# Altium PCB painel_meb.PcbDoc
Units mm, origin at the board's own origin, x right, y up, seen from the top; angles counter-clockwise.
Board outline 175.89 x 40 mm, 2 copper layers (Top Layer, Bottom Layer); 112 components, 106 nets, 292 pads, 87 vias.
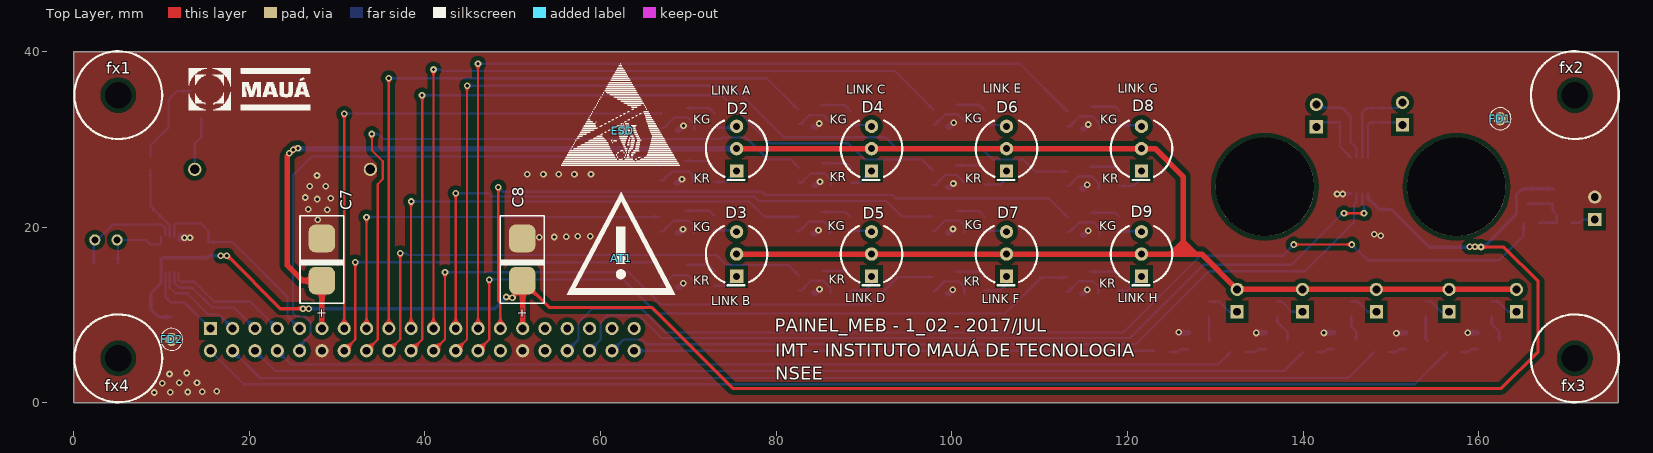
[diagram p0: Top Layer view]
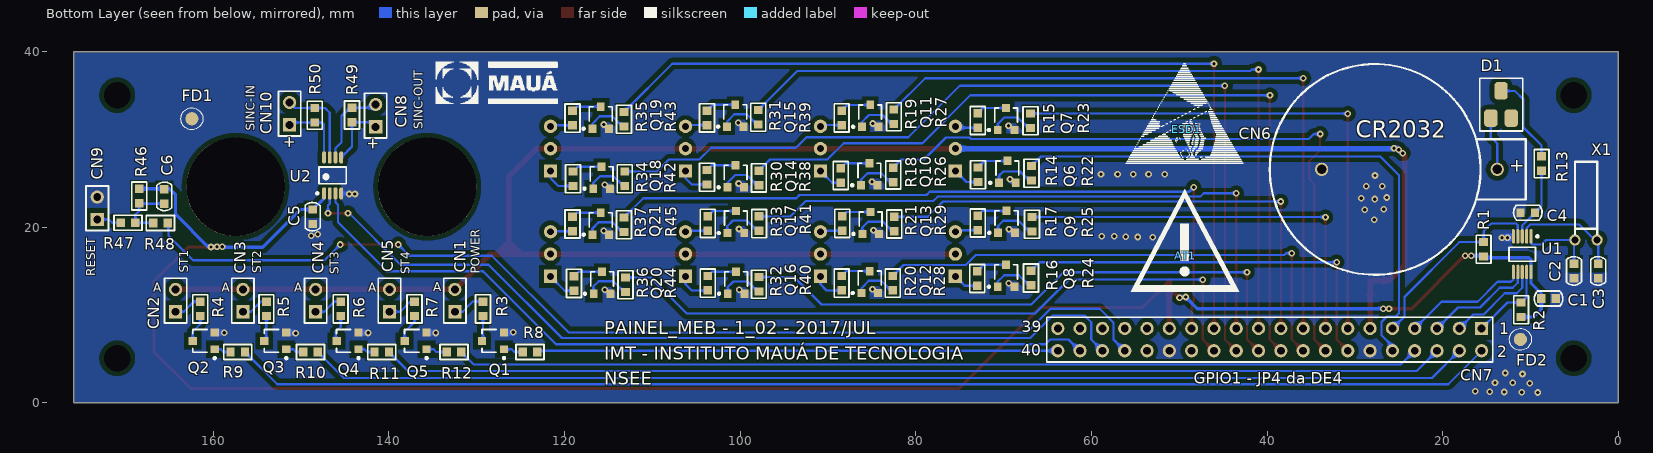
[diagram p1: Bottom Layer view, seen from below]

## Layer stack, top to bottom
Top Solder: solder mask 0.0102, Solder Resist, Dk 3.5
Top Layer: signal copper 0.0356
Dielectric1: core 0.32, FR-4, Dk 4.8
Bottom Layer: signal copper 0.0356
Bottom Solder: solder mask 0.0102, Solder Resist, Dk 3.5

## Board outline
0,0 0,40.005 175.895,40.005 175.895,0

## Design rules (kind name [scope] priority, off if disabled: settings)
Clearance Clearance_3 [(InComponent('U1'))] p1: gap=0.127 except(0.508: Arc-Fill Arc-Poly Track-Fill Track-Poly SMDPad-Fill SMDPad-Poly THPad-Fill THPad-Poly Via-Fill Via-Poly Fill-Fill Fill-Poly Poly-Poly)
Clearance Clearance_4 [(InComponent('U2'))] p2: gap=0.178 except(0.508: Arc-Fill Arc-Poly Track-Fill Track-Poly SMDPad-Fill SMDPad-Poly THPad-Fill THPad-Poly Via-Fill Via-Poly Fill-Fill Fill-Poly Poly-Poly)
Clearance Clearance_2 [InNamedPolygon('gnd_bottom')] p3: gap=0.508
Clearance Clearance_1 [InNamedPolygon('gnd_top')] p4: gap=0.508
Clearance [All] p5: gap=0.254 except(0.178: Track-Track Track-SMDPad)
HoleSize [All] p1: absolutevalues=TRUE maxlimit=150 minlimit=0.025 maxpercent=80.000 minpercent=20.000
PlaneClearance [All] p1: clearance=0.635
PolygonConnect PolygonConnect_2 [All vs IsNamedPolygon('gnd_bottom')] p1: connectstyle=Direct reliefconductorwidth=0.254 reliefentries=4 polygonreliefangle="90 Angle" airgapwidth=0.254
PolygonConnect PolygonConnect_1 [All vs IsNamedPolygon('gnd_top')] p2: connectstyle=Direct reliefconductorwidth=0.254 reliefentries=4 polygonreliefangle="90 Angle" airgapwidth=0.254
PolygonConnect [All] p3: connectstyle=Relief reliefconductorwidth=0.254 reliefentries=4 polygonreliefangle="45 Angle" airgapwidth=0.254
RoutingVias [All] p1: holewidth=0.381 width=0.762 viastyle="Through Hole" minholewidth=0.381 minwidth=0.762 maxholewidth=0.381 maxwidth=0.762
SilkToSolderMaskClearance SilkscreenOverComponentPads [IsPad] p1: minsilkscreentomaskgap=0.076 clearancetoexposedcopper=TRUE
SolderMaskExpansion [All] p1: expansion=0.102
Width Width_alim [(InNetClass('Alimentacoes'))] p1: maxlimit=1.016 minlimit=0.254 preferedwidth=0.635
Width [All] p2: maxlimit=0.635 minlimit=0.254 preferedwidth=0.381
27 further rules are at their usual default settings.

## Classes and differential pairs
net class Alimentacoes: +3V3 +5V GND

## Components (designator, comment, footprint, x,y, rotation, side; value= is the part's Value field where it differs from the comment)
AT1 "##nl" LEIA_DOCUMENTACAO 62.357,16.459 r0 top
AT1 "##nl" LEIA_DOCUMENTACAO 49.327,16.789 r180 bottom
C1 "Capacitor Cerâmico SMD" "0603 - CAP - montagem na maquina" 7.95,11.887 r180 bottom
C2 "Capacitor Cerâmico SMD" "0603 - CAP - montagem na maquina" 5.055,15.037 r270 bottom
C3 "Capacitor Cerâmico SMD" "0603 - CAP - montagem na maquina" 2.286,15.037 r270 bottom
C4 "Capacitor Cerâmico SMD" "0603 - CAP - montagem na maquina" 10.312,21.666 r0 bottom
C5 "Capacitor Cerâmico SMD" "0603 - CAP - montagem na maquina" 148.666,21.209 r270 bottom
C6 "Capacitor Cerâmico SMD" "0603 - CAP - montagem na maquina" 165.583,23.52 r90 bottom
C7 "Capacitor de tântalo" CASE-B 28.27,16.332 r90 top
C8 "Capacitor de tântalo" CASE-B 51.079,16.332 r90 top
CN1 "Header 2" HDR1X2 132.486,10.389 r90 bottom
CN2 "Header 2" HDR1X2 164.287,10.389 r90 bottom
CN3 "Header 2" HDR1X2 156.616,10.389 r90 bottom
CN4 "Header 2" HDR1X2 148.336,10.389 r90 bottom
CN5 "Header 2" HDR1X2 139.929,10.389 r90 bottom
CN6 "11.0137" "Soquete para bateria SB19" 13.792,26.594 r90 bottom
CN7 "Header 20X2" HDR2X20 15.57,8.484 r0 bottom
CN8 "Header 2" HDR1X2 141.503,31.445 r90 bottom
CN9 "Header 2" HDR1X2 173.203,20.904 r90 bottom
CN10 "Header 2" HDR1X2 151.308,31.674 r90 bottom
D1 "04.0100" "SOT23-3N - BAT54FAIRCHILD" 13.36,33.985 r90 bottom
D2 "SSL-LX3059IGW-CA" "Led 3mm bicolor" 75.489,28.956 r0 top
D3 "SSL-LX3059IGW-CA" "Led 3mm bicolor" 75.489,16.956 r0 top
D4 "SSL-LX3059IGW-CA" "Led 3mm bicolor" 90.856,28.956 r0 top
D5 "SSL-LX3059IGW-CA" "Led 3mm bicolor" 90.856,16.956 r0 top
D6 "SSL-LX3059IGW-CA" "Led 3mm bicolor" 106.223,28.956 r0 top
D7 "SSL-LX3059IGW-CA" "Led 3mm bicolor" 106.223,16.956 r0 top
D8 "SSL-LX3059IGW-CA" "Led 3mm bicolor" 121.59,28.956 r0 top
D9 "SSL-LX3059IGW-CA" "Led 3mm bicolor" 121.59,16.956 r0 top
ESD "##nl" ESTATICA 62.509,31.013 r0 top
ESD1 "##nl" ESTATICA 49.149,31.166 r180 bottom
Fab_orientation "Comment" "TEXTO FABRICACAO" 53.162,117.653 r0 top
FD1 "##nl" FIDUCIAL 162.433,32.36 r180 top
FD2 "##nl" FIDUCIAL 11.151,7.239 r180 top
fx1 "Comment" fixa_m3 5.08,35.052 r0 top
fx2 "Comment" fixa_m3 170.942,35.052 r0 top
fx3 "Comment" fixa_m3 170.942,5.08 r0 top
fx4 "Comment" fixa_m3 5.08,5.08 r0 top
Q1 "QNPN" SOT-23B 128.143,7.061 r90 bottom
Q2 "QNPN" SOT-23B 161.087,7.061 r90 bottom
Q3 "QNPN" SOT-23B 152.933,7.061 r90 bottom
Q4 "QNPN" SOT-23B 144.704,7.061 r90 bottom
Q5 "QNPN" SOT-23B 136.957,7.061 r90 bottom
Q6 "QNPN" SOT-23B 69.571,26.314 r180 bottom
Q7 "QNPN" SOT-23B 69.723,32.334 r180 bottom
Q8 "QNPN" SOT-23B 69.723,14.478 r180 bottom
Q9 "QNPN" SOT-23B 69.672,20.625 r180 bottom
Q10 "QNPN" SOT-23B 85.293,26.035 r180 bottom
Q11 "QNPN" SOT-23B 85.192,32.69 r180 bottom
Q12 "QNPN" SOT-23B 85.242,13.767 r180 bottom
Q13 "QNPN" SOT-23B 85.141,20.498 r180 bottom
Q14 "QNPN" SOT-23B 100.508,25.806 r180 bottom
Q15 "QNPN" SOT-23B 100.559,32.715 r180 bottom
Q16 "QNPN" SOT-23B 100.457,13.691 r180 bottom
Q17 "QNPN" SOT-23B 100.482,20.599 r180 bottom
Q18 "QNPN" SOT-23B 115.773,25.654 r180 bottom
Q19 "QNPN" SOT-23B 115.875,32.487 r180 bottom
Q20 "QNPN" SOT-23B 115.722,13.691 r180 bottom
Q21 "QNPN" SOT-23B 115.875,20.422 r180 bottom
R1 "Res3" "0603 - MONTAGEM MÁQUINA" 15.342,17.501 r270 bottom
R2 "Res3" "0603 - MONTAGEM MÁQUINA" 11.074,10.617 r270 bottom
R3 "Res3" "0603 - MONTAGEM MÁQUINA" 129.286,10.719 r90 bottom
R4 "Res3" "0603 - MONTAGEM MÁQUINA" 161.468,10.719 r90 bottom
R5 "Res3" "0603 - MONTAGEM MÁQUINA" 153.949,10.719 r90 bottom
R6 "Res3" "0603 - MONTAGEM MÁQUINA" 145.491,10.719 r90 bottom
R7 "Res3" "0603 - MONTAGEM MÁQUINA" 137.084,10.719 r90 bottom
R8 "Res3" "0603 - MONTAGEM MÁQUINA" 123.927,5.811 r180 bottom
R9 "Res3" "0603 - MONTAGEM MÁQUINA" 157.201,5.811 r180 bottom
R10 "Res3" "0603 - MONTAGEM MÁQUINA" 148.92,5.811 r180 bottom
R11 "Res3" "0603 - MONTAGEM MÁQUINA" 140.818,5.811 r180 bottom
R12 "Res3" "0603 - MONTAGEM MÁQUINA" 132.588,5.811 r180 bottom
R13 "Res3" "0603 - MONTAGEM MÁQUINA" 8.738,27.254 r270 bottom
R14 "Res3" "0603 - MONTAGEM MÁQUINA" 72.923,25.984 r270 bottom
R15 "Res3" "0603 - MONTAGEM MÁQUINA" 72.949,32.156 r270 bottom
R16 "Res3" "0603 - MONTAGEM MÁQUINA" 73,14.173 r270 bottom
R17 "Res3" "0603 - MONTAGEM MÁQUINA" 72.949,20.498 r270 bottom
R18 "Res3" "0603 - MONTAGEM MÁQUINA" 88.544,25.908 r270 bottom
R19 "Res3" "0603 - MONTAGEM MÁQUINA" 88.443,32.461 r270 bottom
R20 "Res3" "0603 - MONTAGEM MÁQUINA" 88.443,13.64 r270 bottom
R21 "Res3" "0603 - MONTAGEM MÁQUINA" 88.367,20.447 r270 bottom
R22 "Res3" "0603 - MONTAGEM MÁQUINA" 66.827,26.162 r90 bottom
R23 "Res3" "0603 - MONTAGEM MÁQUINA" 66.929,32.131 r90 bottom
R24 "Res3" "0603 - MONTAGEM MÁQUINA" 66.878,14.224 r90 bottom
R25 "Res3" "0603 - MONTAGEM MÁQUINA" 66.777,20.345 r90 bottom
R26 "Res3" "0603 - MONTAGEM MÁQUINA" 82.575,25.959 r90 bottom
R27 "Res3" "0603 - MONTAGEM MÁQUINA" 82.499,32.588 r90 bottom
R28 "Res3" "0603 - MONTAGEM MÁQUINA" 82.626,13.64 r90 bottom
R29 "Res3" "0603 - MONTAGEM MÁQUINA" 82.448,20.371 r90 bottom
R30 "Res3" "0603 - MONTAGEM MÁQUINA" 103.784,25.705 r270 bottom
R31 "Res3" "0603 - MONTAGEM MÁQUINA" 103.784,32.461 r270 bottom
R32 "Res3" "0603 - MONTAGEM MÁQUINA" 103.683,13.64 r270 bottom
R33 "Res3" "0603 - MONTAGEM MÁQUINA" 103.683,20.447 r270 bottom
R34 "Res3" "0603 - MONTAGEM MÁQUINA" 119.024,25.527 r270 bottom
R35 "Res3" "0603 - MONTAGEM MÁQUINA" 119.101,32.436 r270 bottom
R36 "Res3" "0603 - MONTAGEM MÁQUINA" 118.923,13.614 r270 bottom
R37 "Res3" "0603 - MONTAGEM MÁQUINA" 119.101,20.371 r270 bottom
R38 "Res3" "0603 - MONTAGEM MÁQUINA" 97.866,25.629 r90 bottom
R39 "Res3" "0603 - MONTAGEM MÁQUINA" 97.942,32.537 r90 bottom
R40 "Res3" "0603 - MONTAGEM MÁQUINA" 97.866,13.513 r90 bottom
R41 "Res3" "0603 - MONTAGEM MÁQUINA" 97.841,20.422 r90 bottom
R42 "Res3" "0603 - MONTAGEM MÁQUINA" 113.132,25.527 r90 bottom
R43 "Res3" "0603 - MONTAGEM MÁQUINA" 113.233,32.309 r90 bottom
R44 "Res3" "0603 - MONTAGEM MÁQUINA" 113.055,13.462 r90 bottom
R45 "Res3" "0603 - MONTAGEM MÁQUINA" 113.233,20.295 r90 bottom
R46 "Res3" "0603 - MONTAGEM MÁQUINA" 168.427,23.571 r90 bottom
R47 "Res3" "0603 - MONTAGEM MÁQUINA" 169.697,20.523 r180 bottom
R48 "Res3" "0603 - MONTAGEM MÁQUINA" 166.014,20.498 r180 bottom
R49 "Res3" "0603 - MONTAGEM MÁQUINA" 144.196,32.791 r90 bottom
R50 "Res3" "0603 - MONTAGEM MÁQUINA" 148.438,32.766 r270 bottom
U1 "MCP79511-I/MS" MCHP-MSOP-MS10_N 10.947,16.942 r270 bottom
U2 "SN65LVDS179MDGKREP" DGK8_L 146.406,25.908 r90 bottom
X1 "XTAL" "CRISTAL DT-38" 3.683,18.567 r90 bottom

## Footprints (in the part's own frame and the unit in brackets; to place one, negate y for a bottom-side part, rotate by r counter-clockwise, add the part's x,y. Pads: shape width x height; smd on the part's side, far side on the other; paste and mask are expansions set on the pad)
"0603 - CAP - montagem na maquina" [mm] "Chip Capacitor, 2-Leads, Body 1,6x0,8mm, IPC Medium Density"
  rect 0.95x1 smd: 1(-0.825,0) 2(0.825,0)
  silkscreen extent -1.62,-0.85 1.62,0.85, body extent -0.89,-0.48 0.89,0.48, height 0.6
"0603 - MONTAGEM MÁQUINA" [mm] "Chip Resistor, 2-Leads, Body 1,6x0,8mm, IPC Medium Density"
  rect 0.95x1 smd: 1(-0.825,0) 2(0.825,0)
  silkscreen extent -1.6,-0.85 1.6,0.85, body extent -0.89,-0.48 0.89,0.48, height 0.6
CASE-B [mm] "Capacitor de tântalo"
  rrect50% 3.15x3 smd mask+0.127: 1(-2.4,0) 2(2.4,0)
  silkscreen extent -4.97,-2.5 4.97,2.5, body extent -1.91,-1.55 1.91,1.55, height 2
"CRISTAL DT-38" [mil] "PTH"
  round 50 hole 31: 1(0,50) 2(0,-50)
  silkscreen extent 25,-50 350,50, body extent 42,-56 350,46, height 102
DGK8_L [mm] "TSOP, 8-Leads, Body 3x3mm, Pitch 0.65mm, IPC High Density"
  oval 1.4x0.45 smd: 1(-2.05,0.975) 2(-2.05,0.325) 3(-2.05,-0.325) 4(-2.05,-0.975) 5(2.05,-0.975) 6(2.05,-0.325) 7(2.05,0.325) 8(2.05,0.975)
  silkscreen extent -2.17,-1.55 0.95,1.88, body extent -1.55,-1.55 1.55,1.55, height 1.1
ESTATICA [mm]
  silkscreen extent -7.04,-4.04 6.52,7.65
FIDUCIAL [mm]
  round 1.5 all layers, no hole paste+0 mask+0.4: 0(0,0)
  Multi-Layer pour cut-out: -0.686,-1.041 -0.457,-1.168 -0.279,-1.219 -0.102,-1.245 0.102,-1.245 0.33,-1.194 0.584,-1.118 0.711,-1.016 0.889,-0.889 1.016,-0.737 1.143,-0.559 1.219,-0.305 1.245,-0.127 1.245,0.152 1.219,0.305 1.118,0.584 0.889,0.914 0.737,1.016 0.559,1.118 0.305,1.219 0.102,1.245 -0.178,1.245 -0.432,1.219 -0.737,0.991 -0.889,0.838 -1.143,0.533 -1.194,0.381 -1.27,0.229 -1.27,-0.025 -1.245,-0.178 -1.168,-0.457 -1.016,-0.686 -0.914,-0.864
  Multi-Layer pour cut-out: -0.686,-1.041 -0.457,-1.168 -0.279,-1.219 -0.102,-1.245 0.102,-1.245 0.33,-1.194 0.584,-1.118 0.711,-1.016 0.889,-0.889 1.016,-0.737 1.143,-0.559 1.219,-0.305 1.245,-0.127 1.245,0.152 1.219,0.305 1.118,0.584 0.889,0.914 0.737,1.016 0.559,1.118 0.305,1.219 0.102,1.245 -0.178,1.245 -0.432,1.219 -0.737,0.991 -0.889,0.838 -1.143,0.533 -1.194,0.381 -1.27,0.229 -1.27,-0.025 -1.245,-0.178 -1.168,-0.457 -1.016,-0.686 -0.914,-0.864
  silkscreen extent -1.25,-1.25 1.25,1.25
fixa_m3 [mil] "Furo de fixação - parafuso m3"
  round 60 hole 118.11 unplated: 0(0,0)
  silkscreen extent -197,-197 197,197
HDR1X2 [mm] "Connector; Header; 2 Position"
  rect 1.5x1.5 hole 0.9: 1(0,0)
  round 1.5 hole 0.9: 2(2.54,0)
  silkscreen extent -1.27,-1.27 3.81,1.27
HDR2X20 [mm] "Connector; Header; 20x2 Position"
  rect 1.5x1.5 hole 0.9: 1(0,0)
  round 1.5 hole 0.9: 2(0,2.54) 3(2.54,0) 4(2.54,2.54) 5(5.08,0) 6(5.08,2.54) 7(7.62,0) 8(7.62,2.54) 9(10.16,0) 10(10.16,2.54) 11(12.7,0) 12(12.7,2.54) 13(15.24,0) 14(15.24,2.54) 15(17.78,0) 16(17.78,2.54) 17(20.32,0) 18(20.32,2.54) 19(22.86,0) 20(22.86,2.54) 21(25.4,0) 22(25.4,2.54) 23(27.94,0) 24(27.94,2.54) 25(30.48,0) 26(30.48,2.54) 27(33.02,0) 28(33.02,2.54) 29(35.56,0) 30(35.56,2.54) 31(38.1,0) 32(38.1,2.54) 33(40.64,0) 34(40.64,2.54) 35(43.18,0) 36(43.18,2.54) 37(45.72,0) 38(45.72,2.54) 39(48.26,0) 40(48.26,2.54)
  silkscreen extent -1.27,-1.27 49.53,3.81
"Led 3mm bicolor" [mil]
  rect 60x60 hole 31: 1(0,-100)
  round 60 hole 31: 2(0,0) 3(0,100)
  silkscreen extent -138,-140 138,126, body extent -69,-89 80,89, height 205
LEIA_DOCUMENTACAO [mm]
  silkscreen extent -6.2,-4.11 6.15,7.52
MCHP-MSOP-MS10_N [mm] "SOP, 10-Leads, Body 3x3mm, Pitch 0.5mm, IPC Medium Density"
  oval 1.65x0.35 smd: 1(-2.025,1) 2(-2.025,0.5) 3(-2.025,0) 4(-2.025,-0.5) 5(-2.025,-1) 6(2.025,-1) 7(2.025,-0.5) 8(2.025,0) 9(2.025,0.5) 10(2.025,1)
  silkscreen extent -2.15,-1.5 0.8,1.85, body extent -1.5,-1.5 1.5,1.5, height 1.1
"Soquete para bateria SB19" [mil] "Soquete para bateria SB19 CR2032"
  round 60 hole 43: 1(0,0) 2(0,787.4)
  silkscreen extent -472,-128 472,1020, body extent -454,-105 452,1004, height 354
"SOT23-3N - BAT54FAIRCHILD" [mm] "SOT23, 3-Leads, Body 2.9x1.3mm, Pitch 0.95mm, Lead Span 2.5mm, IPC Medium Density"
  rrect50% 2x1.52 smd: 1(-1.55,1.16) 2(-1.55,-1.16) 3(1.55,0)
  silkscreen extent -3.02,-2.46 3,2.41, body extent -0.7,-1.5 0.7,1.5, height 1.1
SOT-23B [mm] "SOT-23; 3 Leads; Body 3.0 x 2.6 mm, inc. leads (LxW max)"
  rect 0.9x0.95 smd: 1(-0.95,-1.25) 2(0.95,-1.25) 3(0,1.25)
  silkscreen extent -2.07,-1.37 1.3,1.25
"TEXTO FABRICACAO" [mm]

## Part data
AT1 AT1: library part ATENCAO, "ATENCAO"
CN1 CN2 CN3 CN4 CN5 CN8 CN9 CN10: "Header, 2-Pin"
CN6: library part "Soquete para Bateria CR2032", "Soquete para Bateria CR2032"
CN7: "Header, 20-Pin, Dual row"
D1: library part BAT54, "Diodo Schottky"
D2 D3 D4 D5 D6 D7 D8 D9: "Led bicolor pth 3mm verde/vermelho"
ESD ESD1: library part ESD, "ESD"
FD1 FD2: library part Fiducial, "Fiducial"
Q1 Q2 Q3 Q4 Q5 Q6 Q7 Q8 Q9 Q10 Q11 Q12 Q13 Q14 Q15 Q16 Q17 Q18 Q19 Q20 Q21: "NPN Bipolar Transistor"
R1 R2 R3 R4 R5 R6 R7 R8 R9 R10 R11 R12 R13 R14 R15 R16 R17 R18 R19 R20 R21 R22 R23 R24 R25 R26 R27 R28 R29 R30 R31 R32 R33 R34 R35 R36 R37 R38 R39 R40 R41 R42 R43 R44 R45 R46 R47 R48 R49 R50: "Resistor"
U1: "3 V SPI Real-Time Clock Calendar with Battery Switchover, 10 MHz Communications Speed, 64 Bytes SRAM, -40 to 85 degC, 10-pin MSOP (MS10), Tube"
U2: "400 Mbps Enhanced Product High-Speed Differential Line Driver and Receiver with LVDS, LVTTL Input and LVDS, LVTTL Output, 1 Tx and 1 Rx, -55 to +125 degC, 8-pin VSSOP (DGK), Green (RoHS & no Sb/Br)"
X1: "Cristal oscilador"

## Free pads (board coordinates)
  round 11.2 hole 11.2 unplated paste+0 mask+0: 0(135.636,24.613) 0(157.455,24.613)

## Via types
v1: diameter 0.762, hole 0.381, Top Layer to Bottom Layer, tented both sides, 87 vias

## Nets (pads, with @x,y where several pads share a name; then routed paths per layer and width w, separated by ;. In a path a pad name is that pad's centre, name@x,y a point inside that pad or via, vN(x,y) a via of type N, cw(c..) or ccw(c..) an arc to the next point about the centre after c; other vN are vias at no path point)
+3V3: C1.1 C5.1 C6.2 C8.1 CN7.29 R1.2 R2.2 R46.2 U1.10 U2.1 | length 229.1
  Top Layer w0.381: v1(16.764,16.764) v1(17.424,16.764) 17.526,16.764 23.546,10.744 v1(26.111,10.744) v1(26.772,10.744) ; v1(49.276,12.065) 49.352,11.989 v1(49.962,11.989) 51.079,13.106 C8.1 ; C8.1@51.13,13.881 54.14,10.871 65.837,10.871 75.057,1.651 162.56,1.651 166.751,5.842 166.751,13.843 162.839,17.755 v1(160.249,17.755) 159.588,17.755 v1(159.563,17.78) v1(158.979,17.78)
  Top Layer w0.635: C8.1 51.13,13.881 CN7.29
  Bottom Layer w0.254: R1.2@15.217,16.551 R1.2
  Bottom Layer w0.356: 8.775,12.458 9.947,13.63 U1.10 9.947,16.297
  Bottom Layer w0.381: 8.775,12.458 C1.1 8.775,10.656 9.639,9.792 R2.2 ; 9.947,16.297 10.201,16.551 R1.2@15.217,16.551 ; R1.2 15.43,16.764 v1(16.764,16.764) ; v1(26.111,10.744) v1(26.772,10.744) 47.955,10.744 v1(49.276,12.065) 49.886,12.065 v1(49.962,11.989) ; U2.1 147.381,23.32 C5.1 150.051,22.034 154.356,17.729 158.928,17.729 v1(158.979,17.78) v1(159.563,17.78) 160.223,17.78 v1(160.249,17.755) 160.579,17.755 164.287,21.463 164.287,23.698 164.985,24.396 R46.2
+5V: C7.1 CN1.2 CN2.2 CN3.2 CN4.2 CN5.2 CN7.11 D2.2 D3.2 D4.2 D5.2 D6.2 D7.2 D8.2 D9.2 | length 226.4
  Top Layer w0.635: 24.308,28.092 24.308,15.697 26.073,13.932 C7.1 CN7.11 ; v1(24.562,28.423) 25.146,29.007 v1(25.552,29.007) ; D3.2 D5.2 D7.2 D9.2 126.34,16.956 ; D2.2 D4.2 D6.2 D8.2 123.165,28.956 126.34,25.781 126.34,16.956 ; CN2.2 CN3.2 CN4.2 CN5.2 CN1.2 128.459,16.956 126.34,16.956
  Bottom Layer w0.635: v1(24.562,28.423) 24.613,28.423 v1(25.019,28.829) 25.197,29.007 v1(25.552,29.007) ; v1@25.552,28.956 D2.2
GND: C1.2 C2.2 C3.2 C4.2 C5.2 C7.2 C8.2 CN6.2 CN7.12 CN7.30 CN9.2 FD1.0 FD2.0 Q1.2 Q2.2 Q3.2 Q4.2 Q5.2 Q6.2 Q7.2 Q8.2 Q9.2 Q10.2 Q11.2 Q12.2 Q13.2 Q14.2 Q15.2 Q16.2 Q17.2 Q18.2 Q19.2 Q20.2 Q21.2 U1.5 U2.4 | length 20
  Bottom Layer w0.254: U1.5 12.093,18.821 v1(12.624,18.821) ; v1(144.526,23.8) v1@144.584,23.858
  Bottom Layer w0.381: v1@144.584,23.858 U2.4
  Bottom Layer w0.635: Q6.2 68.854,25.064 v1(69.266,25.476) ; Q9.2 68.981,19.375 v1(69.393,19.787) ; Q8.2 69.032,13.228 v1(69.418,13.614) ; Q7.2 68.956,31.084 v1(69.444,31.572) ; Q13.2 84.399,19.248 v1(84.811,19.66) ; Q11.2 84.5,31.44 v1(84.887,31.826) ; Q12.2 84.5,12.517 v1(84.938,12.954) ; Q10.2 84.577,24.785 v1(84.988,25.197) ; Q16.2 99.664,12.441 v1(100.101,12.878) ; Q17.2 99.664,19.349 v1(100.127,19.812) ; Q14.2 99.74,24.556 v1(100.178,24.994) ; Q15.2 99.766,31.465 v1(100.203,31.902) ; Q20.2 114.98,12.441 v1(115.418,12.878) ; Q18.2 114.98,24.404 v1(115.418,24.841) ; Q21.2 115.107,19.172 v1(115.545,19.609) ; Q19.2 115.082,31.237 v1(115.545,31.699) ; v1(125.832,8.052) 125.872,8.011 Q1.2 ; v1(134.645,7.976) 134.681,8.011 Q5.2 ; v1(142.367,7.976) 142.403,8.011 Q4.2 ; v1(150.622,7.95) 150.683,8.011 Q3.2 ; v1(158.75,8.001) 158.76,8.011 Q2.2
  other v1: 9.195,1.194 10.998,1.219 13.005,1.245 14.63,1.27 16.281,1.321 10.084,2.261 14.046,2.286 12.014,2.311 10.922,3.302 12.878,3.404 13.259,18.821 53.035,18.872 54.712,18.898 56.083,18.923 57.404,18.974 58.826,18.999 148.844,19.05 148.082,19.228 27.788,20.853 28.88,21.996 26.721,22.073 27.737,23.216 29.261,23.317 26.365,23.393 143.866,23.8 26.873,24.689 28.702,24.689 27.711,25.908 51.664,26.035 53.492,26.035 55.245,26.035 57.023,26.035 58.903,26.035
NetC2_1: C2.1 U1.1 X1.1 | length 8.8
  Bottom Layer w0.254: C2.1 5.055,18.466 X1.1 8.23,18.567 8.763,18.034 9.779,18.034 9.947,18.202 U1.1
NetC3_1: C3.1 U1.2 X1.2 | length 12.4
  Bottom Layer w0.254: C3.1 2.286,18.44 X1.2 2.692,18.567 4.445,20.32 10.033,20.32 10.439,19.914 U1.2@10.439,19.193
NetC4_1: C4.1 R13.2 U1.3 | length 8.4
  Bottom Layer w0.254: R13.2 8.738,22.416 C4.1 10.947,20.206 U1.3
NetC6_1: C6.1 R46.1 R47.2 R48.1 | length 7.2
  Bottom Layer w0.254: C6.1 R46.1@168.377,22.695 ; R48.1 166.865,20.523 R47.2 168.872,21.424 168.427,21.869 R46.1
NetCN1_1: CN1.1 R3.2 | length 3.7
  Bottom Layer w0.254: R3.2 130.442,11.544 131.597,10.389 CN1.1
NetCN2_1: CN2.1 R4.2 | length 3.3
  Bottom Layer w0.254: R4.2 162.192,11.544 163.347,10.389 CN2.1
NetCN3_1: CN3.1 R5.2 | length 3.1
  Bottom Layer w0.254: R5.2 154.572,11.544 155.727,10.389 CN3.1
NetCN4_1: CN4.1 R6.2 | length 3.3
  Bottom Layer w0.254: R6.2 146.19,11.544 147.345,10.389 CN4.1
NetCN5_1: CN5.1 R7.2 | length 3.3
  Bottom Layer w0.254: R7.2 137.554,11.544 138.709,10.389 CN5.1
NetCN6_1: CN6.1 D1.1 | length 6.1
  Bottom Layer w0.254: CN6.1 13.792,29.54 14.52,30.268 D1.1
NetCN7_1: CN7.1 R2.1 U1.9 | length 9.5
  Bottom Layer w0.254: U1.9 10.447,12.069 R2.1 11.087,11.43 12.624,11.43 CN7.1
NetCN7_2: CN7.2 R9.2 | length 143.9
  Bottom Layer w0.254: CN7.2 19.38,2.134 152.698,2.134 R9.2
NetCN7_3: CN7.3 U1.8 | length 10.9
  Bottom Layer w0.254: U1.8 10.947,13.132 11.582,12.497 12.929,12.497 15.342,10.084 16.51,10.084 CN7.3
NetCN7_4: CN7.4 R10.2 | length 132.5
  Bottom Layer w0.254: CN7.4 21.209,2.845 145.129,2.845 R10.2
NetCN7_5: CN7.5 U1.7 | length 12.6
  Bottom Layer w0.254: U1.7 11.447,13.673 12.014,13.106 13.513,13.106 15.748,10.871 18.263,10.871 CN7.5
NetCN7_6: CN7.6 R11.2 | length 121.2
  Bottom Layer w0.254: CN7.6 22.962,3.632 137.814,3.632 R11.2
NetCN7_7: CN7.7 U1.6 | length 14.4
  Bottom Layer w0.254: U1.6 11.947,14.062 12.217,13.792 13.767,13.792 16.027,11.532 20.142,11.532 CN7.7
NetCN7_8: CN7.8 R12.2 | length 109.8
  Bottom Layer w0.254: CN7.8 24.765,4.369 130.321,4.369 R12.2
NetCN7_9: CN7.9 R1.1 U1.4 | length 22.6
  Bottom Layer w0.254: U1.4 11.447,20.236 11.633,20.422 14.503,20.422 15.342,19.583 R1.1 15.354,18.313 18.11,18.313 24.359,12.065 24.359,9.855 CN7.9
NetCN7_10: CN7.10 R22.2 | length 65.1
  Bottom Layer w0.254: CN7.10 25.73,6.477 26.975,7.722 26.975,9.22 26.34,9.855 25.324,9.855 24.994,10.185 24.994,25.959 27.102,28.067 65.747,28.067 R22.2
NetCN7_13: CN7.13 R23.2 | length 61.1
  Top Layer w0.254: CN7.13 v1(30.81,32.918) v1@30.836,32.893
  Bottom Layer w0.254: CN7.13 CN7.13@30.81,8.788 ; v1(30.81,32.918) 30.848,32.956 R23.2 R23.2@66.814,33.071
NetCN7_14: CN7.14 R24.2 | length 46.1
  Top Layer w0.254: CN7.14 32.08,7.214 v1(32.08,16.027)
  Bottom Layer w0.254: CN7.14 CN7.14@30.81,6.147 ; v1(32.08,16.027) 65.9,16.027 R24.2 R24.2@66.84,15.088
NetCN7_15: CN7.15 R25.2 | length 46.5
  Top Layer w0.254: CN7.15 v1(33.35,21.158)
  Bottom Layer w0.254: CN7.15 CN7.15@33.63,8.763 ; v1(33.35,21.158) 33.362,21.17 R25.2
NetCN7_16: CN7.16 R26.2 | length 76.5
  Top Layer w0.254: CN7.16 34.62,7.214 34.62,24.917 35.204,25.502 35.204,27.534 33.96,28.778 v1(33.96,30.632)
  Bottom Layer w0.254: v1@33.807,30.632 34.671,30.632 35.255,30.048 73.711,30.048 73.889,30.226 76.556,30.226 79.07,27.711 81.648,27.711 R26.2
NetCN7_17: CN7.17 R27.2 | length 76.6
  Top Layer w0.254: CN7.17 v1(35.89,36.982)
  Bottom Layer w0.254: v1(35.89,36.982) 78.93,36.982 R27.2
NetCN7_18: CN7.18 R28.2 | length 58.1
  Top Layer w0.254: CN7.18 37.186,7.239 v1(37.186,17.043)
  Bottom Layer w0.254: v1(37.186,17.043) 37.846,17.043 38.049,16.84 73.177,16.84 74.32,15.697 81.394,15.697 R28.2
NetCN7_19: CN7.19 R29.2 | length 59.2
  Top Layer w0.254: CN7.19 v1(38.43,22.936)
  Bottom Layer w0.254: v1(38.43,22.936) 76.911,22.936 78.652,21.196 R29.2
NetCN7_20: CN7.20 R38.2 | length 91.4
  Top Layer w0.254: CN7.20 39.7,7.214 39.7,35.001 v1(39.675,35.027)
  Bottom Layer w0.254: v1(39.675,35.027) 73.786,35.027 79.247,29.566 88.214,29.566 90.068,27.711 96.608,27.711 R38.2
NetCN7_21: CN7.21 R39.2 | length 88.4
  Top Layer w0.254: CN7.21 v1(40.97,37.973)
  Bottom Layer w0.254: v1(40.97,37.973) 41.732,37.973 41.91,37.795 93.51,37.795 R39.2
NetCN7_22: CN7.22 R40.2 | length 67.9
  Top Layer w0.254: CN7.22 42.291,7.264 v1(42.291,14.884)
  Bottom Layer w0.254: v1(42.291,14.884) 63.17,14.884 66.853,11.201 90.729,11.201 93.865,14.338 R40.2
NetCN7_23: CN7.23 R41.2 | length 70.9
  Top Layer w0.254: CN7.23 v1(43.51,23.876)
  Bottom Layer w0.254: v1@43.51,23.774 v1(43.51,23.876) 47.219,23.876 47.6,23.495 77.495,23.495 78.003,22.987 92.532,22.987 94.273,21.247 R41.2
NetCN7_24: CN7.24 R42.2 | length 103.1
  Top Layer w0.254: CN7.24 44.806,7.239 v1(44.806,36.119)
  Bottom Layer w0.254: v1(44.806,36.119) 74.981,36.119 80.848,30.251 92.456,30.251 93.65,29.058 103.302,29.058 104.648,27.711 108.128,27.711 109.487,26.352 R42.2
NetCN7_25: CN7.25 R43.2 | length 99.6
  Top Layer w0.254: CN7.25 v1(46.05,38.633)
  Bottom Layer w0.254: v1(46.05,38.633) 107.734,38.633 R43.2
NetCN7_26: CN7.26 R44.2 | length 77.6
  Top Layer w0.254: CN7.26 47.32,7.214 v1(47.32,14.021)
  Bottom Layer w0.254: v1@47.32,14.046 62.56,14.046 66.421,10.185 106.096,10.185 110.197,14.287 R44.2
NetCN7_27: CN7.27 R45.2 | length 82.5
  Top Layer w0.254: v1(48.362,24.562) 48.362,11.608 48.59,11.379 CN7.27
  Bottom Layer w0.254: v1(48.362,24.562) 48.87,24.054 78.41,24.054 78.791,23.673 93.243,23.673 93.599,23.317 111.036,23.317 R45.2
NetCN7_34: CN7.34 R48.2 | length 120.6
  Top Layer w0.254: v1(138.938,18.034) v1(145.542,18.034)
  Bottom Layer w0.254: CN7.34 57.48,7.214 57.48,9.144 59.055,10.719 64.668,10.719 67.361,8.026 119.532,8.026 128.27,16.764 137.668,16.764 v1(138.938,18.034) ; v1(145.542,18.034) 147.32,16.256 162.306,16.256 165.1,19.05 165.1,20.408 R48.2
NetCN7_36: CN7.36 U2.2 | length 100.3
  Top Layer w0.254: v1(144.653,21.59) v1(146.939,21.59)
  Bottom Layer w0.254: CN7.36 60.02,7.214 60.02,9.195 60.782,9.957 64.414,9.957 66.98,7.391 120.294,7.391 128.651,15.748 138.684,15.748 144.526,21.59 v1(144.653,21.59) ; U2.2 146.731,22.687 146.939,22.479 v1(146.939,21.59)
NetCN7_38: CN7.38 U2.3 | length 94.4
  Bottom Layer w0.254: CN7.38 61.341,5.944 62.611,7.214 64.694,7.214 65.227,6.68 120.98,6.68 129.286,14.986 140.208,14.986 145.796,20.574 145.796,22.569 146.081,22.853 U2.3
NetCN7_40: CN7.40 R8.2 | length 59.3
  Bottom Layer w0.254: CN7.40 122.969,5.944 R8.2
NetCN8_1: CN8.1 R49.1 U2.5 | length 7.4
  Bottom Layer w0.254: CN8.1 142.025,31.966 R49.1 144.196,29.193 U2.5
NetCN8_2: CN8.2 R49.2 U2.6 | length 9.4
  Bottom Layer w0.254: CN8.2 141.872,33.616 R49.2 144.438,33.616 145.39,32.664 145.39,29.693 146.081,29.002 U2.6
NetCN9_1: CN9.1 R47.1 | length 2.8
  Bottom Layer w0.254: R47.1 171.501,20.523 171.882,20.904 CN9.1
NetCN10_1: CN10.1 R50.2 U2.8 | length 7.9
  Bottom Layer w0.254: U2.8 147.381,31.715 147.607,31.941 R50.2 151.041,31.941 CN10.1
NetCN10_2: CN10.2 R50.1 U2.7 | length 10.1
  Bottom Layer w0.254: U2.7 146.731,33.04 147.281,33.591 R50.1 150.685,33.591 CN10.2
NetD1_3: D1.3 R13.1 | length 10.3
  Bottom Layer w0.254: R13.1 8.738,29.312 10.795,31.369 10.795,34.544 11.786,35.535 D1.3
NetD2_1: D2.1 R14.2 | length 3.1
  Bottom Layer w0.254: R14.2 74.232,25.159 D2.1
NetD2_3: D2.3 R15.2 | length 2.6
  Bottom Layer w0.254: R15.2 75.324,31.331 D2.3
NetD3_1: D3.1 R16.2 | length 2.9
  Bottom Layer w0.254: R16.2 74.421,13.348 D3.1
NetD3_3: D3.3 R17.2 | length 2.6
  Bottom Layer w0.254: R17.2 75.312,19.673 D3.3
NetD4_1: D4.1 R18.2 | length 2.9
  Bottom Layer w0.254: R18.2 89.523,25.083 D4.1
NetD4_3: D4.3 R19.2 | length 2.5
  Bottom Layer w0.254: R19.2 90.716,31.636 D4.3
NetD5_1: D5.1 R20.2 | length 3.6
  Bottom Layer w0.254: R20.2 90.158,12.815 90.856,13.513 D5.1
NetD5_3: D5.3 R21.2 | length 2.5
  Bottom Layer w0.254: R21.2 90.73,19.622 D5.3
NetD6_1: D6.1 R30.2 | length 3.6
  Bottom Layer w0.254: R30.2 105.525,24.88 106.223,25.578 D6.1
NetD6_3: D6.3 R31.2 | length 2.5
  Bottom Layer w0.254: R31.2 106.083,31.636 D6.3
NetD7_1: D7.1 R32.2 | length 3.7
  Bottom Layer w0.254: R32.2 105.525,12.815 106.223,13.513 D7.1
NetD7_3: D7.3 R33.2 | length 2.6
  Bottom Layer w0.254: R33.2 106.097,19.622 D7.3
NetD8_1: D8.1 R34.2 | length 3.8
  Bottom Layer w0.254: R34.2 120.714,24.702 121.59,25.578 D8.1
NetD8_3: D8.3 R35.2 | length 2.5
  Bottom Layer w0.254: R35.2 121.475,31.611 D8.3
NetD9_1: D9.1 R36.2 | length 3.3
  Bottom Layer w0.254: R36.2 119.963,12.789 D9.1
NetD9_3: D9.3 R37.2 | length 2.5
  Bottom Layer w0.254: R37.2 121.54,19.546 D9.3
NetQ1_1: Q1.1 R8.1 | length 2.3
  Bottom Layer w0.254: R8.1 125.699,5.811 125.999,6.111 Q1.1
NetQ1_3: Q1.3 R3.1 | length 2.9
  Bottom Layer w0.254: R3.1 129.286,7.168 Q1.3
NetQ2_1: Q2.1 R9.1 | length 1.9
  Bottom Layer w0.254: R9.1 158.846,5.811 159.146,6.111 Q2.1
NetQ2_3: Q2.3 R4.1 | length 3.2
  Bottom Layer w0.254: R4.1 161.468,8.966 162.337,8.097 Q2.3
NetQ3_1: Q3.1 R10.1 | length 2.1
  Bottom Layer w0.254: R10.1 150.591,5.811 150.891,6.111 Q3.1
NetQ3_3: Q3.3 R5.1 | length 2.9
  Bottom Layer w0.254: R5.1 153.949,7.295 Q3.3
NetQ4_1: Q4.1 R11.1 | length 1.9
  Bottom Layer w0.254: R11.1 142.463,5.811 142.763,6.111 Q4.1
NetQ4_3: Q4.3 R6.1 | length 3
  Bottom Layer w0.254: R6.1 145.491,8.687 146.05,8.128 Q4.3@146.05,7.157
NetQ5_1: Q5.1 R12.1 | length 2.4
  Bottom Layer w0.254: R12.1 134.589,5.811 134.889,6.111 Q5.1
NetQ5_3: Q5.3 R7.1 | length 3.3
  Bottom Layer w0.254: R7.1 137.084,9.22 138.207,8.097 Q5.3
NetQ6_1: Q6.1 R22.1 | length 5.1
  Bottom Layer w0.254: R22.1 67.095,25.337 68.123,26.365 70.053,26.365 70.521,25.898 Q6.1
NetQ6_3: Q6.3 R14.1 | length 3.7
  Bottom Layer w0.254: Q6.3 72.168,27.564 R14.1
NetQ7_1: Q7.1 R23.1 | length 5.2
  Bottom Layer w0.254: R23.1 67.196,31.306 68.402,32.512 69.926,32.512 70.673,31.765 Q7.1
NetQ7_3: Q7.3 R15.1 | length 3.5
  Bottom Layer w0.254: Q7.3 72.346,33.584 R15.1
NetQ8_1: Q8.1 R24.1 | length 5.2
  Bottom Layer w0.254: R24.1 67.12,13.399 68.275,14.554 69.926,14.554 70.688,13.792 70.688,13.243 Q8.1
NetQ8_3: Q8.3 R16.1 | length 3.6
  Bottom Layer w0.254: Q8.3 72.27,15.728 R16.1
NetQ9_1: Q9.1 R25.1 | length 5.4
  Bottom Layer w0.254: R25.1 67.069,19.52 68.301,20.752 70.053,20.752 70.622,20.183 Q9.1
NetQ9_3: Q9.3 R17.1 | length 3.5
  Bottom Layer w0.254: Q9.3 72.397,21.875 R17.1
NetQ10_1: Q10.1 R26.1 | length 5
  Bottom Layer w0.254: R26.1 82.919,25.134 83.947,26.162 85.496,26.162 86.243,25.415 Q10.1
NetQ10_3: Q10.3 R18.1 | length 3.5
  Bottom Layer w0.254: Q10.3 87.992,27.285 R18.1
NetQ11_1: Q11.1 R27.1 | length 4.4
  Bottom Layer w0.254: R27.1 82.766,31.763 83.795,32.791 85.319,32.791 86.142,31.968
NetQ11_3: Q11.3 R19.1 | length 3.5
  Bottom Layer w0.254: Q11.3 87.789,33.94 R19.1
NetQ12_1: Q12.1 R28.1 | length 4.9
  Bottom Layer w0.254: R28.1 82.843,12.815 83.947,13.919 85.344,13.919 86.192,13.071 Q12.1
NetQ12_3: Q12.3 R20.1 | length 3.4
  Bottom Layer w0.254: Q12.3 87.891,15.017 R20.1
NetQ13_1: Q13.1 R29.1 | length 5.1
  Bottom Layer w0.254: R29.1 82.665,19.546 83.744,20.625 85.446,20.625 86.091,19.98 Q13.1
NetQ13_3: Q13.3 R21.1 | length 3.4
  Bottom Layer w0.254: Q13.3 87.891,21.748 R21.1
NetQ14_1: Q14.1 R38.1 | length 4.5
  Bottom Layer w0.254: R38.1 98.108,24.804 99.263,25.959 100.559,25.959 101.473,25.044
NetQ14_3: Q14.3 R30.1 | length 3.5
  Bottom Layer w0.254: Q14.3 103.258,27.056 R30.1
NetQ15_1: Q15.1 R39.1 | length 4.4
  Bottom Layer w0.254: R39.1 98.108,31.712 99.263,32.868 100.66,32.868 101.509,32.019
NetQ15_3: Q15.3 R31.1 | length 3.5
  Bottom Layer w0.254: Q15.3 103.105,33.965 R31.1
NetQ16_1: Q16.1 R40.1 | length 5
  Bottom Layer w0.254: R40.1 98.006,12.688 99.162,13.843 100.762,13.843 101.407,13.198 Q16.1
NetQ16_3: Q16.3 R32.1 | length 3.4
  Bottom Layer w0.254: Q16.3 103.207,14.941 R32.1
NetQ17_1: Q17.1 R41.1 | length 5.1
  Bottom Layer w0.254: R41.1 98.057,19.597 99.238,20.777 100.813,20.777 101.473,20.117 Q17.1@101.473,19.39
NetQ17_3: Q17.3 R33.1 | length 3.4
  Bottom Layer w0.254: Q17.3 103.105,21.849 R33.1
NetQ18_1: Q18.1 R42.1 | length 5
  Bottom Layer w0.254: R42.1 113.323,24.702 114.427,25.806 115.951,25.806 116.723,25.034 Q18.1
NetQ18_3: Q18.3 R34.1 | length 3.5
  Bottom Layer w0.254: Q18.3 118.472,26.904 R34.1
NetQ19_1: Q19.1 R43.1 | length 5
  Bottom Layer w0.254: R43.1 113.399,31.484 114.554,32.639 115.976,32.639 116.825,31.791 Q19.1
NetQ19_3: Q19.3 R35.1 | length 3.4
  Bottom Layer w0.254: Q19.3 118.625,33.737 R35.1
NetQ20_1: Q20.1 R44.1 | length 5.3
  Bottom Layer w0.254: R44.1 113.221,12.637 114.452,13.868 116.103,13.868 116.713,13.259 116.713,12.4 Q20.1
NetQ20_3: Q20.3 R36.1 | length 3.4
  Bottom Layer w0.254: Q20.3 118.422,14.941 R36.1
NetQ21_1: Q21.1 R45.1 | length 5
  Bottom Layer w0.254: R45.1 113.424,19.47 114.529,20.574 116.129,20.574 116.825,19.878 Q21.1
NetQ21_3: Q21.3 R37.1 | length 3.4
  Bottom Layer w0.254: Q21.3 118.625,21.672 R37.1
pads on no net: CN7.28 CN7.31 CN7.32 CN7.33 CN7.35 CN7.37 CN7.39 D1.2 fx1.0 fx2.0 fx3.0 fx4.0

## Polygon pours and split planes (outlines as drawn)
GND on Top Layer "gnd_top" (solid, remove dead copper, pour order 0): 0.203,0.152 0.076,0.279 0.076,39.954 175.768,39.954 175.87,39.853 175.87,0.152
GND on Bottom Layer "gnd_bottom" (solid, remove dead copper, pour order 2): 0,0.254 0,39.878 175.768,39.878 175.768,0.254 175.514,0 0,0 0,0.254

## Other copper
Top Layer:
  region net +5V: 124.284,16.74 126.327,18.783 128.13,16.98 128.13,16.74 125.184,16.74
Bottom Layer:
  region net GND: 11.849,18.974 11.849,18.39 12.941,18.39 12.941,18.974 12.941,19.253 11.849,19.253

## Silkscreen, mask and mechanical layers (free items; w line width, h text height)
Top Overlay:
  drawing of 373 lines, arcs and shapes, not listed
  text "PAINEL_MEB" at 36.068,153.264 h2.54
  text "CCB" at 30.302,149.149 h2.54
  text "1_00 - Initial revision - Jun/4/2016" at 78.181,148.336 h2.54
  text "1_01 - Rtcc + mac_address chip, with cr2032 battery - Nov/16/2016" at 78.181,145.288 h2.54
  text "1_02 - Pth 3 mm bicolor leds for SpW channels," at 78.181,142.113 h2.54
  text "1_02" at 31.826,140.005 h2.54
  text "lvds driver/receiver for sinc-out/sinc-in - Jul/2017" at 84.531,138.989 h2.54
  text "TOP & BOTTOM: SIGNAL + GND PLANE" at 21.158,131.369 h2.54
  text "2" at 44.018,109.017 h2.54
  text "1 oz / 1 oz" at 26.746,101.905 h2.54
  text "LINK E" at 103.53,35.331 h1.02
  text "LINK G" at 118.897,35.331 h1.02
  text "LINK C" at 87.96,35.23 h1.02
  text "LINK A" at 72.619,35.103 h1.02
  text "KG" at 101.448,31.902 h1.02
  text "KG" at 70.536,31.801 h1.02
  text "KG" at 86.106,31.801 h1.02
  text "KG" at 116.891,31.801 h1.02
  text "KR" at 86.106,25.273 h1.02
  text "KR" at 70.637,25.07 h1.02
  text "KR" at 101.549,25.07 h1.02
  text "KR" at 117.119,25.07 h1.02
  text "KG" at 101.448,19.761 h1.02
  text "KG" at 85.877,19.66 h1.02
  text "KG" at 116.789,19.66 h1.02
  text "KG" at 70.536,19.533 h1.02
  text "KR" at 85.979,13.589 h1.02
  text "KR" at 70.536,13.462 h1.02
  text "KR" at 101.346,13.36 h1.02
  text "KR" at 116.789,13.132 h1.02
  text "LINK D" at 87.859,11.481 h1.02
  text "LINK H" at 118.897,11.481 h1.02
  text "LINK F" at 103.429,11.379 h1.02
  text "LINK B" at 72.619,11.151 h1.02
  text "PAINEL_MEB - 1_02 - 2017/JUL" at 79.832,7.595 h2.54
  text "IMT - INSTITUTO MAUÁ DE TECNOLOGIA" at 79.883,4.775 h2.54
  text "NSEE" at 79.883,2.108 h2.54
Bottom Overlay:
  drawing of 369 lines, arcs and shapes, not listed
  text "SINC-OUT" at 136.144,31.191 h1.02 r270
  text "SINC-IN" at 155.245,31.013 h1.02 r270
  text "+" at 150.8,28.956 h1.27 r270
  text "+" at 141.249,28.804 h1.27 r270
  text "ST1" at 162.839,14.808 h1.02 r270
  text "ST2" at 154.534,14.757 h1.02 r270
  text "POWER" at 129.667,14.707 h1.02 r270
  text "ST3" at 145.72,14.681 h1.02 r270
  text "ST4" at 137.617,14.656 h1.02 r270
  text "RESET" at 173.457,14.453 h1.02 r270
  text "A" at 134.925,12.7 h1.02
  text "A" at 166.802,12.675 h1.02
  text "A" at 142.367,12.649 h1.02
  text "A" at 150.8,12.649 h1.02
  text "A" at 159.029,12.649 h1.02
  text "PAINEL_MEB - 1_02 - 2017/JUL" at 115.494,7.315 h2.54
  text "IMT - INSTITUTO MAUÁ DE TECNOLOGIA" at 115.468,4.42 h2.54
  text "GPIO1 - JP4 da DE4" at 48.336,2.21 h1.27
  text "NSEE" at 115.468,1.549 h2.54
Board_Outline:
  the board outline again, w0.254
Dimensions:
  lines w0.254: -6.502,1.356 -5.994,-0.168 ; -6.502,38.313 -5.994,39.837 ; -6.248,-0.168 -5.74,-0.168 ; -6.248,39.837 -5.74,39.837 ; -5.994,11.811 -5.994,-0.168 ; -5.994,27.859 -5.994,39.837 ; -5.486,1.356 -5.994,-0.168 ; -5.486,38.313 -5.994,39.837 ; -0.594,-8.255 -0.594,-7.747 ; 0.93,-8.509 -0.594,-8.001 ; 0.93,-7.493 -0.594,-8.001 ; 78.695,-8.001 -0.594,-8.001 ; 96.012,-8.001 175.301,-8.001 ; 173.777,-8.509 175.301,-8.001 ; 173.777,-7.493 175.301,-8.001 ; 175.301,-8.255 175.301,-7.747
  text "40.005 (mm)" at -5.08,12.065 h1.52 r90
  text "175.895 (mm)" at 78.949,-8.915 h1.52

## Text inside footprints (layer, text, board x,y; h text height)
C7: Top Overlay "+" at 28.702,9.627 h1 r90
C8: Top Overlay "+" at 51.511,9.627 h1 r90
CN6: Bottom Overlay "CR2032" at 29.896,30.175 h1.93; Bottom Overlay "+" at 10.871,26.086 h1.52 r270
CN7: Bottom Overlay "1" at 13.538,7.849 h1.27; Bottom Overlay "2" at 13.767,5.207 h1.27; Bottom Overlay "40" at 67.996,5.359 h1.27; Bottom Overlay "39" at 67.92,8.026 h1.27
Fab_orientation: Top Overlay "WITH EXPLICIT NSEE RESPONSIBLE AUTHORIZATION" at 81.204,51.308 h2.54; Top Overlay "- GERBER MODIFICATIONS ARE ONLY ALLOWED" at 79.654,54.331 h2.54; Top Overlay "- ELECTRICAL TESTS ARE MANDATORY" at 79.756,59.36 h2.54; Top Overlay "- DIMENSIONAL TOLERANCE: +/- 0.2 mm" at 79.934,64.389 h2.54; Top Overlay "7. ADDITIONAL NOTES:" at 78.283,69.342 h2.54; Top Overlay "- IPC-6011 CLASS 2 / IPC-6012 CLASS 2 / IPC-A-600 CLASS 2" at 79.934,76.505 h2.54; Top Overlay "6. SPECIFIED STANDARDS:" at 78.207,80.874 h2.54; Top Overlay "- COVER VIAS WITH SOLDER MASK ON BOTH SIDES" at 80.035,88.138 h2.54; Top Overlay "- IONIC CONTAMINATION AFTER SOLDERING: 14 ug NaCl / in2 MAX." at 80.035,92.507 h2.54; Top Overlay "- GREEN EPOXY THERMAL CURE OR PHOTO IMAGEABLE" at 80.035,97.257 h2.54; Top Overlay "- BOTH SIDES" at 80.137,101.702 h2.54; Top Overlay "5. SOLDER MASK:" at 78.105,106.07 h2.54; Top Overlay "- WHITE (THERMAL CURE EPOXY)" at 80.162,112.166 h2.54; Top Overlay "4. SILKSCREEN MASK:" at 78.105,116.967 h2.54; Top Overlay "- HOT AIR SOLDER LEVELING (HASL) - SnPb" at 21.844,52.502 h2.54; Top Overlay "3. FINISHING:" at 19.126,56.896 h2.54; Top Overlay "- Cu THICKNESS ON HOLE: 20 um + SnPb MIN." at 21.946,63.678 h2.54; Top Overlay "- DISPLACEMENT: 0.1 mm MAX." at 21.895,67.767 h2.54; Top Overlay "- NON PLATED HOLE TOLERANCE: +/- 0.1 mm" at 21.768,72.212 h2.54; Top Overlay "- PLATED HOLE TOLERANCE: +/- 0.1 mm" at 21.768,76.53 h2.54; Top Overlay "2. HOLE CHARACTERISTICS:" at 19.126,81.026 h2.54; Top Overlay "- TD MIN.: 310 ºC" at 21.184,88.265 h2.54; Top Overlay "- TG MIN.: 150 ºC" at 21.184,92.888 h2.54; Top Overlay "- RAW MATERIAL: FR-4" at 20.93,97.917 h2.54; Top Overlay "- Cu THICKNESS (FINISHED):" at 21.234,105.029 h2.54; Top Overlay "- LAYER NUMBERS:" at 21.158,109.068 h2.54; Top Overlay "- TOTAL THICKNESS: 1.6 mm +/- 0.2 mm" at 21.057,113.005 h2.54; Top Overlay "1. LAMINATE SPECIFICATIONS:" at 18.72,117.373 h2.54; Top Overlay "GENERAL NOTES:" at 18.872,122.53 h2.54; Top Overlay "LAYER STACKUP:" at 19.075,135.661 h2.54; Top Overlay "REVISIONS DESCRIPTION:" at 76.962,153.365 h2.54; Top Overlay "REVISION:" at 18.974,140.106 h2.54; Top Overlay "CODE NUMBER:" at 18.872,144.577 h2.54; Top Overlay "AUTHOR:" at 18.771,149.022 h2.54; Top Overlay "BOARD TITLE:" at 18.872,153.365 h2.54